# Altium PCB 电子脚铐本体主控板V3.PcbDoc
Units mm, origin at the board's own origin, x right, y up, seen from the top; angles counter-clockwise.
Board outline 20 x 50 mm, 2 copper layers (Top Layer, Bottom Layer), stack 1.071 mm thick; 72 components, 48 nets, 216 pads, 38 vias.
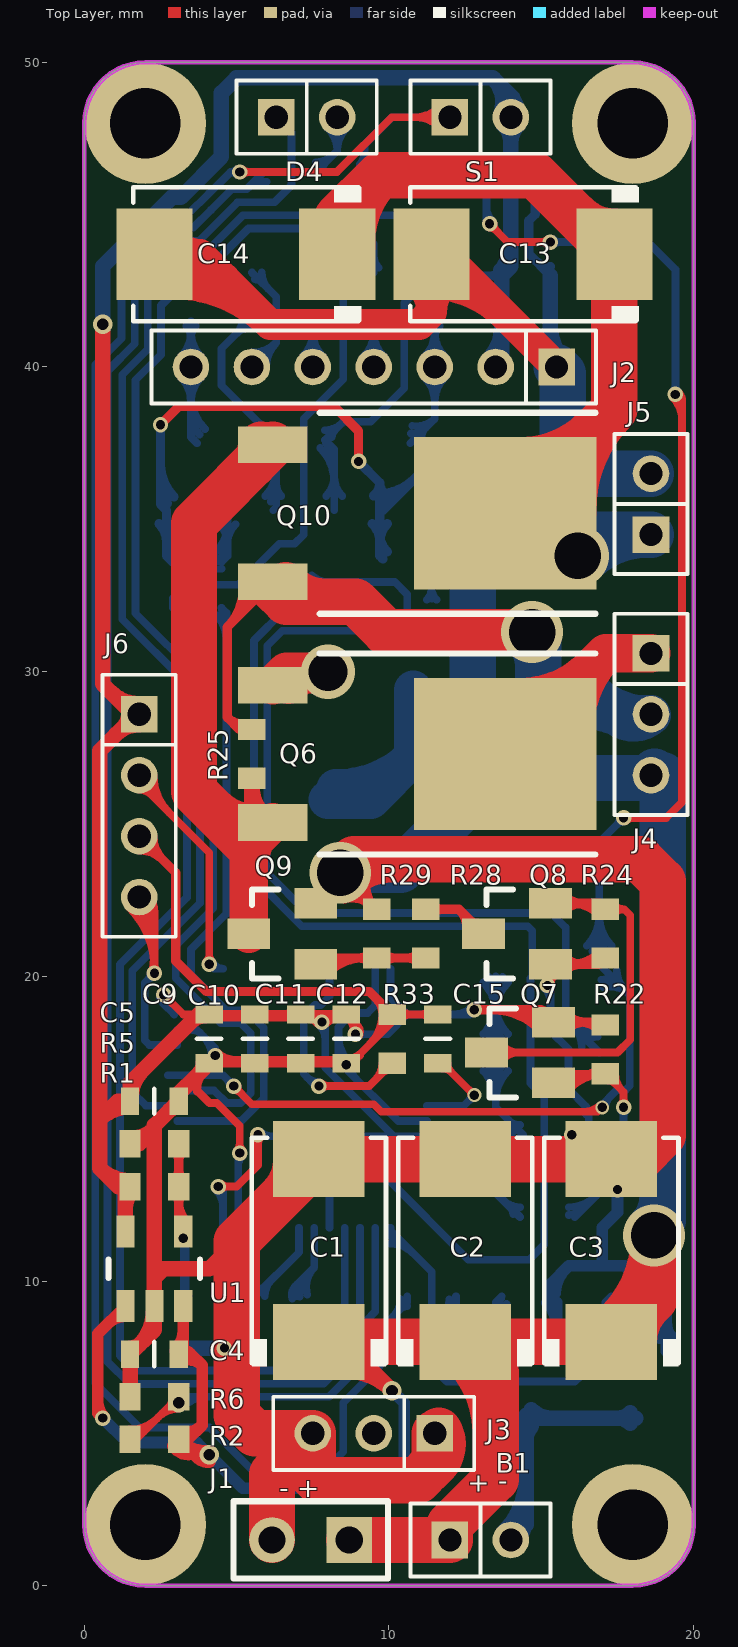
[diagram p0: Top Layer view]
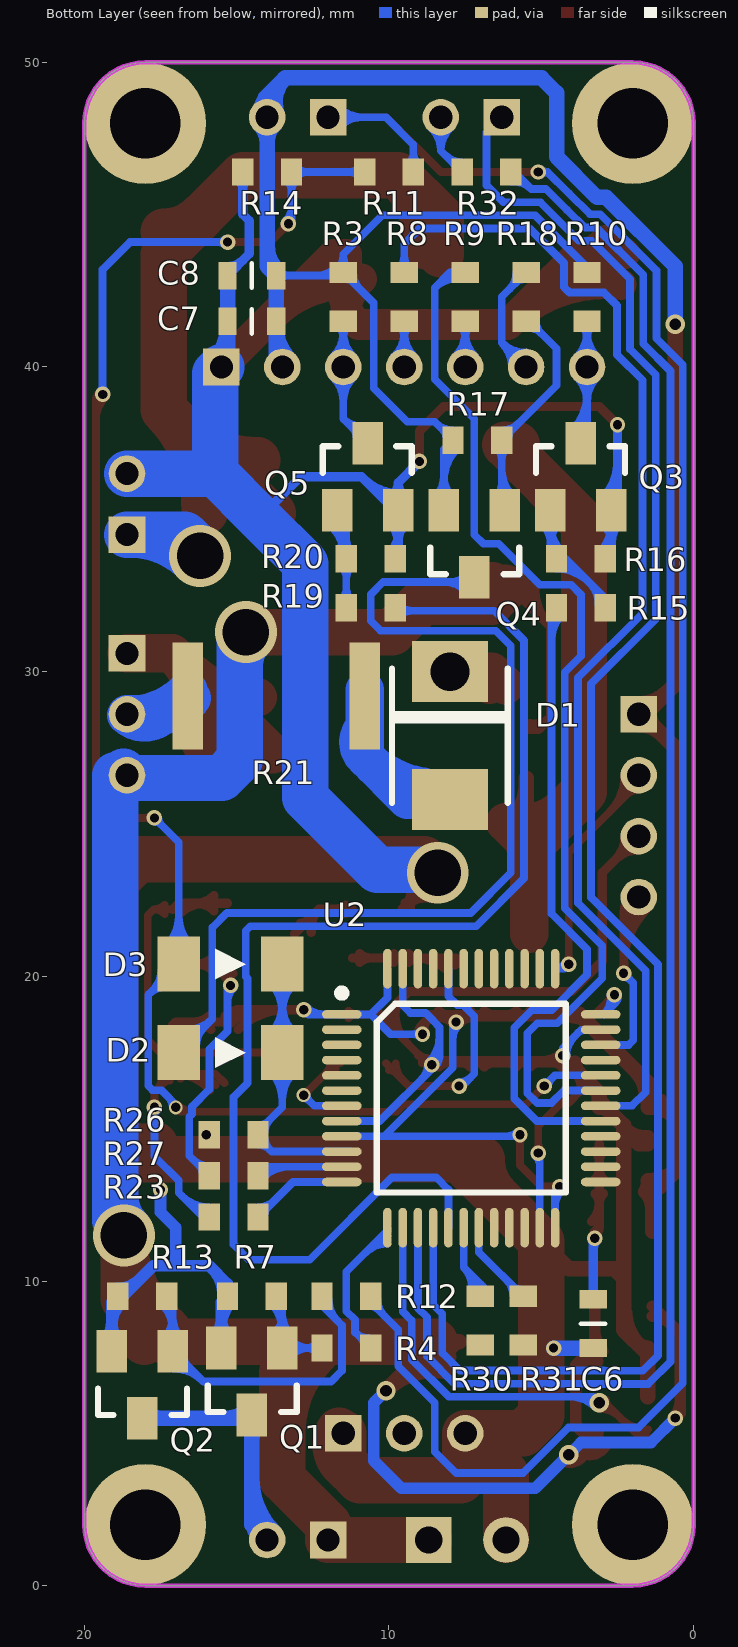
[diagram p1: Bottom Layer view, seen from below]
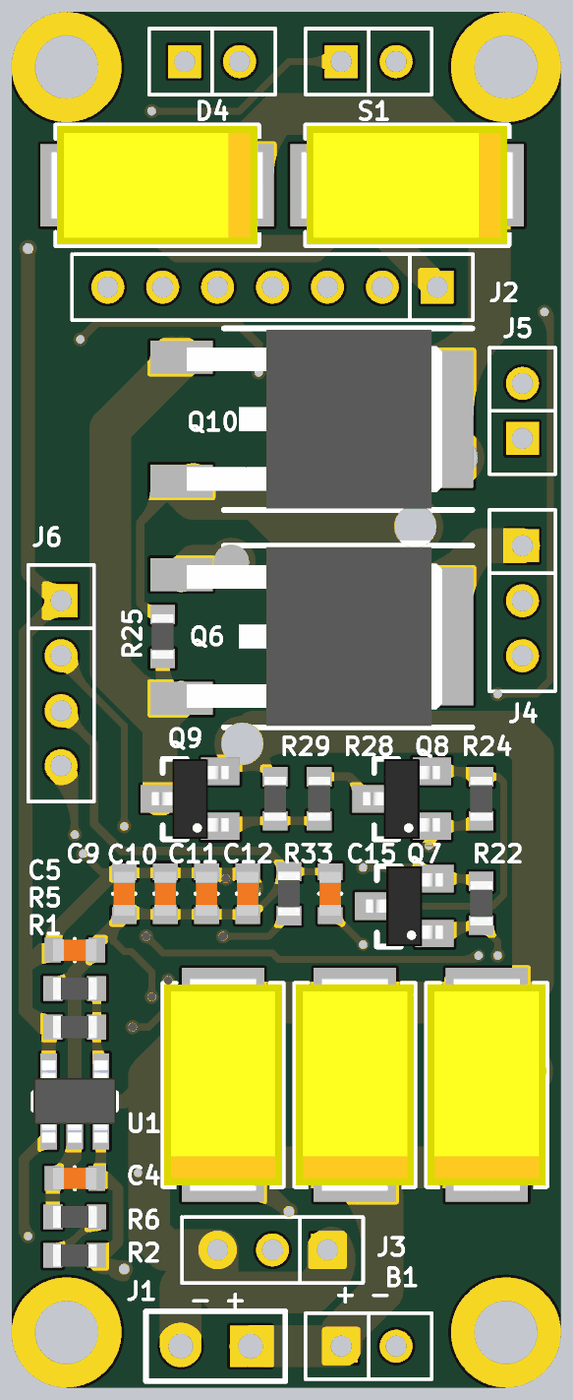
[diagram p2: 3D render of the assembled board from above, using the file's embedded part models]
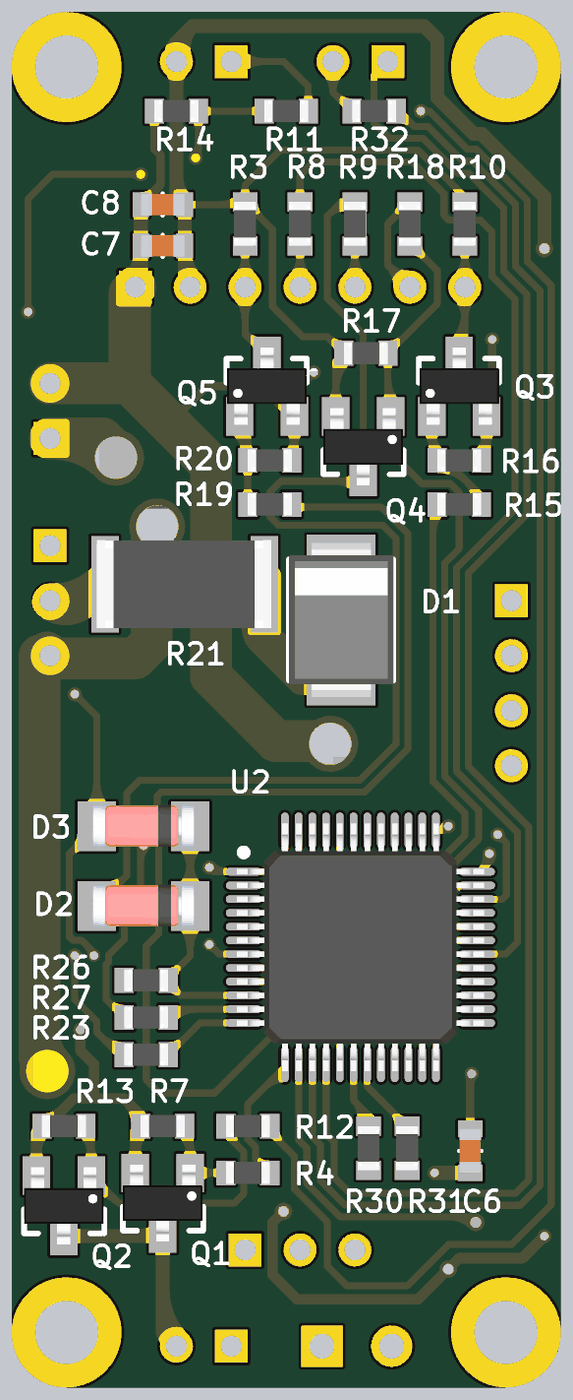
[diagram p3: 3D render of the assembled board from below, using the file's embedded part models]

## Layer stack, top to bottom
Top Solder: solder mask 0.0102, Solder Resist, Dk 3.5
Top Layer: signal copper 0.0356
Dielectric 1: dielectric 1, FR-4, Dk 4.8
Bottom Layer: signal copper 0.0356
Bottom Solder: solder mask 0.0102, Solder Resist, Dk 3.5

## Board outline
0,2 ccw(c2,2) 2,0 18,0 ccw(c18,2) 20,2 20,48 ccw(c18,48) 18,50 2,50 ccw(c2,48) 0,48

## Design rules (kind name [scope] priority, off if disabled: settings)
Clearance [All] p1: gap=0.152
ComponentClearance [All] p1: gap=0 collisioncheckmode=3 verticalgap=0 showdistances=FALSE
Height [All] p1: minheight=0 maxheight=50.8 prefheight=12.7
HoleSize [All] p1: absolutevalues=TRUE maxlimit=5.08 minlimit=0.025 maxpercent=80.000 minpercent=20.000
HoleToHoleClearance [All] p1: gap=0.152 allowstackedmicrovias=TRUE
MinimumSolderMaskSliver [All] p1: minsoldermaskwidth=0
PlaneConnect [All] p1: planeconnectstyle=Direct reliefexpansion=0.508 reliefentries=4 reliefconductorwidth=0.254 reliefairgap=0.254
PolygonConnect [All] p1: connectstyle=Direct reliefconductorwidth=0.254 reliefentries=4 polygonreliefangle="90 Angle" airgapwidth=0.254
RoutingVias [All] p1: holewidth=0.711 width=1.27 viastyle="Through Hole" minholewidth=0.203 minwidth=0.305 maxholewidth=5.08 maxwidth=7.62
SilkToSilkClearance [All] p1: silktosilkclearance=0
SilkToSolderMaskClearance [IsPad] p1: minsilkscreentomaskgap=0 clearancetoexposedcopper=TRUE
SolderMaskExpansion [All] p1: expansion=0.102
Width [All] p1: maxlimit=4 minlimit=0.254 preferedwidth=0.254
21 further rules are at their usual default settings.

## Components (designator, comment, footprint, x,y, rotation, side; value= is the part's Value field where it differs from the comment)
B1 "beep" Jk1*2-2.0 13,1.5 r0 top locked
C1 "210uF/16V" C7343 7.7,11 r90 top locked
C2 "210uF/16V" C7343 12.5,11 r90 top locked
C3 "210uF/16V" C7343 17.3,11 r90 top locked
C4 "0.1uF" C0603 2.3,7.6 r0 top locked
C5 "10uF" C0603 2.3,15.9 r0 top locked
C6 "470pF" C0603 3.3,8.6 r270 bottom locked
C7 "10uF" C0603 14.5,41.5 r0 bottom locked
C8 "0.1uF" C0603 14.5,43 r0 bottom locked
C9 "0.1uF" C0603 4.1,17.95 r270 top locked
C10 "0.1uF" C0603 5.6,17.95 r270 top locked
C11 "0.1uF" C0603 7.1,17.95 r270 top locked
C12 "0.1uF" C0603 8.6,17.95 r270 top locked
C13 "210uF/16V" C7343 14.4,43.7 r180 top locked
C14 "210uF/16V" C7343 5.3,43.7 r180 top locked
C15 "0.1uF" C0603 11.6,17.95 r90 top locked
D1 "SK58B" SMB 8,27.9 r90 bottom locked
D2 "1N4148" SOD-80-S 15.2,17.5 r180 bottom locked
D3 "1N4148" SOD-80-S 15.2,20.4 r180 bottom locked
D4 "LED" Jk1*2-2.0 7.3,48.2 r0 top locked
J1 "Jack 1x2" HDR1X2 8.7,1.5 r180 top locked
J2 "Jack 1x7" Jk1*7-2.0 9.5,40 r180 top locked
J3 "Jack 1x3" Jk1*3-2.0 9.5,5 r180 top locked
J4 "Jack 1x3" Jk1*3-2.0 18.6,28.6 r270 top locked
J5 "Jack 1x2" Jk1*2-2.0 18.6,35.5 r90 top locked
J6 "SHD1X4-2.00" Jk1*4-2.0 1.8,25.6 r270 top locked
Q1 "S8050" SOT-23 14.5,6.7 r0 bottom locked
Q2 "S8050" SOT-23 18.1,6.6 r0 bottom locked
Q3 "S8050" SOT-23 3.7,36.4 r180 bottom locked
Q4 "S8550" SOT-23 7.2,34.2 r0 bottom locked
Q5 "S8050" SOT-23 10.7,36.4 r180 bottom locked
Q6 "MJD3055" TO-252 10,27.3 r270 top locked
Q7 "S8550" SOT-23 14.3,17.5 r90 top locked
Q8 "S8550" SOT-23 14.2,21.4 r90 top locked
Q9 "ZXTN2031F" SOT-23 6.5,21.4 r90 top locked
Q10 "2SA1615" TO-252 10,35.2 r270 top locked
R1 "100K" R0603 2.3,13.1 r0 top locked
R2 "300K" R0603 2.3,4.8 r180 top locked
R3 "300K" R0603 11.5,42.3 r90 bottom locked
R4 "300K" R0603 11.4,7.8 r0 bottom locked
R5 "160K" R0603 2.3,14.5 r180 top locked
R6 "100K" R0603 2.3,6.2 r180 top locked
R7 "100K" R0603 14.5,9.5 r180 bottom locked
R8 "10R" R0603 9.5,42.3 r90 bottom locked
R9 "10R" R0603 7.5,42.3 r90 bottom locked
R10 "300K" R0603 3.5,42.3 r90 bottom locked
R11 "1K" R0603 10,46.4 r0 bottom locked
R12 "300K" R0603 11.4,9.5 r0 bottom locked
R13 "100K" R0603 18.1,9.5 r180 bottom locked
R14 "100K" R0603 14,46.4 r0 bottom locked
R15 "300k" R0603 3.7,32.1 r180 bottom locked
R16 "100K" R0603 3.7,33.7 r0 bottom locked
R17 "300K" R0603 7.1,37.6 r0 bottom locked
R18 "100k" R0603 5.5,42.3 r90 bottom locked
R19 "300k" R0603 10.6,32.1 r180 bottom locked
R20 "100K" R0603 10.6,33.7 r0 bottom locked
R21 "51R" R2512 13.7,29.2 r0 bottom locked
R22 "300K" R0603 17.1,17.6 r90 top locked
R23 "100K" R0603 15.1,12.1 r180 bottom locked
R24 "300K" R0603 17.1,21.4 r90 top locked
R25 "300K" R0603 5.5,27.3 r270 top locked
R26 "300K" R0603 15.1,14.8 r0 bottom locked
R27 "100K" R0603 15.1,13.45 r180 bottom locked
R28 "300K" R0603 11.2,21.4 r90 top locked
R29 "100K" R0603 9.6,21.4 r270 top locked
R30 "NC" R0603 7,8.7 r90 bottom locked
R31 "NC" R0603 5.6,8.7 r90 bottom locked
R32 "1K" R0603 6.8,46.4 r0 bottom locked
R33 "100K" R0603 10.1,17.95 r90 top locked
S1 "Switch" Jk1*2-2.0 13,48.2 r0 top locked
U1 "MIC5219YM5" SOT-23-5 2.3,10.4 r90 top locked
U2 "STM32F103CB" LQFP48 7.3,16 r180 bottom locked

## Footprints (in the part's own frame and the unit in brackets; to place one, negate y for a bottom-side part, rotate by r counter-clockwise, add the part's x,y. Pads: shape width x height; smd on the part's side, far side on the other; paste and mask are expansions set on the pad)
C0603 [mm]
  rect 0.6x0.9 smd: 1(-0.8,0) 2(0.8,0)
  silkscreen extent 0,-0.4 0,0.4, body extent -0.8,-0.4 0.8,0.4, height 0.5
C7343 [mm] "100uF/25V"
  rect 2.5x3 smd: 1(-3,0) 2(3,0)
  silkscreen extent -3.8,-2.2 3.7,2.2, body extent -3.87,-2.15 3.87,2.15, height 2.9
HDR1X2 [mm] "Connector; Header; 2 Position"
  rect 1.5x1.5 hole 0.9: 1(0,0)
  round 1.5 hole 0.9: 2(2.54,0)
  silkscreen extent -1.27,-1.27 3.81,1.27
Jk1*2-2.0 [mm]
  rect 1.2x1.2 hole 0.762: 1(-1,0)
  round 1.2 hole 0.762: 2(1,0)
  silkscreen extent -2.3,-1.2 2.3,1.2
Jk1*3-2.0 [mm]
  rect 1.2x1.2 hole 0.762: 1(-2,0)
  round 1.2 hole 0.762: 2(0,0) 3(2,0)
  silkscreen extent -3.3,-1.2 3.3,1.2
Jk1*4-2.0 [mm] "4P，直插，2.0mm间距，排母"
  rect 1.2x1.2 hole 0.762: 1(-3,0)
  round 1.2 hole 0.762: 2(-1,0) 3(1,0) 4(3,0)
  silkscreen extent -4.3,-1.2 4.3,1.2, body extent -4.25,-1.22 4.25,1.18, height 4.3
Jk1*7-2.0 [mm]
  rect 1.2x1.2 hole 0.762: 1(-6,0)
  round 1.2 hole 0.762: 2(-4,0) 3(-2,0) 4(0,0) 5(2,0) 6(4,0) 7(6,0)
  silkscreen extent -7.3,-1.2 7.3,1.2
LQFP48 [mm]
  oval 1.3x0.28 smd: 1(-4.25,2.75) 2(-4.25,2.25) 3(-4.25,1.75) 4(-4.25,1.25) 5(-4.25,0.75) 6(-4.25,0.25) 7(-4.25,-0.25) 8(-4.25,-0.75) 9(-4.25,-1.25) 10(-4.25,-1.75) 11(-4.25,-2.25) 12(-4.25,-2.75) 25(4.25,-2.75) 26(4.25,-2.25) 27(4.25,-1.75) 28(4.25,-1.25) 29(4.25,-0.75) 30(4.25,-0.25) 31(4.25,0.25) 32(4.25,0.75) 33(4.25,1.25) 34(4.25,1.75) 35(4.25,2.25) 36(4.25,2.75)
  oval 0.28x1.3 smd: 13(-2.75,-4.25) 14(-2.25,-4.25) 15(-1.75,-4.25) 16(-1.25,-4.25) 17(-0.75,-4.25) 18(-0.25,-4.25) 19(0.25,-4.25) 20(0.75,-4.25) 21(1.25,-4.25) 22(1.75,-4.25) 23(2.25,-4.25) 24(2.75,-4.25) 37(2.75,4.25) 38(2.25,4.25) 39(1.75,4.25) 40(1.25,4.25) 41(0.75,4.25) 42(0.25,4.25) 43(-0.25,4.25) 44(-0.75,4.25) 45(-1.25,4.25) 46(-1.75,4.25) 47(-2.25,4.25) 48(-2.75,4.25)
  silkscreen extent -4.38,-3.1 3.1,3.57, body extent -4.49,-4.5 4.51,4.5, height 1.8
R0603 [mm]
  rect 0.7x0.9 smd: 1(-0.8,0) 2(0.8,0)
  body extent -0.8,-0.4 0.8,0.4, height 0.37
R2512 [mm]
  rect 1x3.5 smd: 1(-2.9,0) 2(2.9,0)
  body extent -3.15,-1.6 3.2,1.6, height 0.47
SMB [mm]
  rect 2x2.5 smd: 1(-2.1,0) 2(2.1,0)
  silkscreen extent -2.2,-1.9 2.2,1.9, body extent -2.79,-1.91 2.81,1.9, height 2.4
SOD-80-S [mm]
  rect 1.4x1.8 smd: 1(-1.7,0) 2(1.7,0)
  silkscreen extent -0.5,-0.5 0.5,0.5, body extent -1.85,-0.79 1.85,0.81, height 1.6
SOT-23 [mm]
  rect 1x1.4 smd: 1(-1,-1.1) 2(1,-1.1) 3(0,1.1)
  silkscreen extent -1.47,0.13 1.45,1, body extent -1.45,-1.4 1.45,1.4, height 1.3
SOT-23-5 [mm]
  rect 1.05x0.6 smd: 1(-1.225,0.95) 2(-1.225,0) 3(-1.225,-0.95) 4(1.225,-0.95) 5(1.225,0.95)
  silkscreen extent -0.3,-1.5 0.3,1.5, body extent -1.5,-1.5 1.5,1.5, height 1.2
TO-252 [mm]
  rect 1.2x2.28 smd: 1(-2.25,-3.816) 3(2.25,-3.816)
  rect 5x6 smd: 2(0,3.816)
  silkscreen extent -3.3,-2.27 3.3,6.78, body extent -3.25,-3.62 3.25,5.68, height 2.3

## Part data
B1: library part Speaker, "Loudspeaker"
C1 C2 C3 C13 C14: library part "Cap Poll"
C4 C9 C10 C11 C12 C15: library part "Cap Semi"
C5 C6 C7 C8: library part CAP, "CAP"
D1 D2 D3: library part DIODE-SWITCHING, "Silicon Epitaxial Planar Diodes"
J1 J2 J3 J4 J5: "插座"
J6: library part HEADER1X4
Q1 Q2 Q3 Q5: "NPN triode, 0.5A Max"
Q4 Q7 Q8: "PNP triode"
Q6 Q10: library part MJD122
Q9: library part S8050, "NPN triode, 0.5A Max"
R1 R2 R5 R6 R30 R31 R32 R33: library part Res
R3 R4 R7 R8 R9 R10 R11 R12 R13 R14 R15 R16 R17 R18 R19 R20 R21 R22 R23 R24 R25 R26 R27 R28 R29: library part RES, "Resistor"
S1: library part Sw
U1: library part MIC5205
U2: library part STM32F103Cx

## Free pads (board coordinates)
  round 4 hole 2.3: ""(2,2) ""(2,48) ""(18,2) ""(18,48)

## Via types
v1: diameter 0.508, hole 0.305, Top Layer to Bottom Layer, tented both sides, 27 vias
v2: diameter 0.635, hole 0.381, Top Layer to Bottom Layer, tented both sides, 4 vias
v3: diameter 2.032, hole 1.524, Top Layer to Bottom Layer, tented both sides, 4 vias
v4: diameter 0.457, hole 0.305, Top Layer to Bottom Layer, tented both sides, 2 vias
v5: diameter 1.778, hole 1.27, Top Layer to Bottom Layer, tented both sides, 1 vias

## Nets (pads, with @x,y where several pads share a name; then routed paths per layer and width w, separated by ;. In a path a pad name is that pad's centre, name@x,y a point inside that pad or via, vN(x,y) a via of type N, cw(c..) or ccw(c..) an arc to the next point about the centre after c; other vN are vias at no path point)
+3.3V: C5.1 C7.1 C8.1 C9.1 C10.1 C11.1 C12.1 J2.2 J6.1 Q4.2 Q7.2 R1.1 R3.2 R10.2 R17.2 R22.2 S1.2 U1.5 U2.1 U2.9 U2.24 U2.36 U2.48 | length 158.7
  Top Layer w0.254: v1@2.6,19.273 cw(c2.6,18.966) 2.817,19.183 cw(c3.034,19.4) v1@2.727,19.4 ; v1(2.6,19.4) 3.25,18.75 3.75,18.75 C9.1 ; C9.1@3.828,18.628 ccw(c3.532,18.332) 3.532,18.75 ccw(c3.532,19.168) C9.1@3.828,18.872 ; v1(4.4,13.1) 5,13.1 5.7,13.8 v1(5.7,14.8) ; v1@4.49,13.01 cw(c4.707,12.793) 4.707,13.1 cw(c4.707,13.407) v1@4.49,13.19 ; v1@5.61,14.71 cw(c5.393,14.493) 5.7,14.493 cw(c6.007,14.493) v1@5.79,14.71 ; C12.1@8.643,18.614 cw(c8.223,18.083) v1@8.9,18.083 ; v1@8.785,18.155 ccw(c8.392,18.342) 8.7,18.65 8.9,18.45 v1(8.9,18.1) ; v1@8.79,18.163 ccw(c8.538,18.309) 8.819,18.385 ; v1@8.81,18.19 ccw(c8.593,18.407) 8.9,18.407 ccw(c9.207,18.407) v1@8.99,18.19 ; 8.814,18.405 ccw(c9.124,18.489) v1@8.964,18.21 ; 8.954,18.396 cw(c8.737,18.178) v1@9.015,18.045
  Top Layer w0.305: v1(12.8,18.9) 15,18.9 Q7.2 17,18.5 R22.2 ; 13.395,18.9 cw(c13.395,16.695) Q7.2@14.954,18.254 ; 14.131,18.9 cw(c14.131,17.431) Q7.2@15.17,18.47 ; Q7.2@14.867,18.9 cw(c14.867,18.167) Q7.2@15.385,18.685 ; Q7.2@15.846,18.254 cw(c16.439,17.661) 16.439,18.5 cw(c16.439,19.339) Q7.2@15.846,18.746 ; 16.282,18.5 cw(c16.282,17.682) R22.2@16.86,18.26
  Top Layer w0.381: C9.1@4.1,18.7 8.65,18.7 C12.1@8.7,18.65 ; C9.1@4.327,18.827 ccw(c4.635,19.135) 4.635,18.7 ; 5.065,18.7 ccw(c5.065,19.135) C10.1@5.373,18.827 ; C10.1@5.827,18.827 ccw(c6.135,19.135) 6.135,18.7 ; 6.565,18.7 ccw(c6.565,19.135) C11.1@6.873,18.827 ; C11.1@7.164,18.7 cw(c7.164,17.864) v1@7.755,18.455 ; C11.1@7.327,18.827 ccw(c7.635,19.135) 7.635,18.7 ; C11.1@7.34,18.779 cw(c7.167,18.135) v1@7.745,18.468 ; C11.1@7.383,18.767 cw(c7.237,18.223) v1@7.743,18.472 ; v1@7.845,18.455 cw(c8.436,17.864) C12.1@8.436,18.7 ; 8.065,18.7 ccw(c8.065,19.135) C12.1@8.373,18.827
  Top Layer w0.508: v2(0.6,41.4) 0.6,29.6 J6.1@1.6,28.6 ; 0.868,29.332 ccw(c1.8,30.264) J6.1@1.8,28.946 ; 1.039,27.939 cw(c1.8,27.177) J6.1@1.8,28.254 ; J6.1@1.28,28.18 ccw(c0.86,28.6) J6.1@1.454,28.6 ; U1.5 1.35,12.95 R1.1 1.108,13.1 0.508,13.7 ; 1.35,12.406 cw(c2.094,12.406) R1.1@1.568,12.932 ; R1.1@1.499,13.296 cw(c1.484,14.675) 0.508,13.7 ; C5.1@1.499,15.704 ccw(c1.465,14.351) 0.508,15.308 ; C5.1@1.546,16.05 cw(c2.743,16.05) 1.897,16.897 ; J6.1@1.7,28.6 0.508,27.408 0.508,15.308 ; 3.53,18.53 cw(c3.95,18.11) C9.1@3.95,18.704 ; C9.1@3.75,18.75 1.5,16.5 C5.1 1.1,15.9 0.508,15.308 ; 0.508,13.7 0.508,15.308
  Bottom Layer w0.254: v1@2.474,19.414 ccw(c2.826,19.375) 2.576,19.124 ; v1@2.512,19.309 cw(c2.309,19.1) 2.6,19.1 ; v1(2.6,19.4) 2.6,19.1 ; v1@2.688,19.309 ccw(c2.891,19.1) 2.6,19.1 ; v1@2.726,19.386 ccw(c3.501,19.301) 2.95,18.75 2.6,19.1 ; R10.2 3.5,43.268 5.21,44.978 10.222,44.978 11.5,43.7 R3.2 10.5,42.1 10.5,39.3 9.4,38.2 8.5,38.2 R17.2 8.2,37.3 Q4.2 ; v1@4.31,13.01 cw(c3.731,12.431) 4.55,12.431 ; v1(4.4,13.1) 4.55,12.95 U2.24 ; v1(5.7,14.8) 5.75,14.75 10.16,14.75 ; v1@5.79,14.89 ccw(c6.127,15.227) 6.127,14.75 ; v1@7.71,18.41 cw(c7.229,17.929) 7.909,17.929 ; R17.2@7.742,37.342 cw(c6.637,36.237) 8.2,36.237 ; v1(7.8,18.5) 7.909,18.391 7.909,17 10.16,14.75 ; R17.2@7.9,37.923 ccw(c7.9,38.703) 8.451,38.151 ; R17.2@7.922,37.522 cw(c7.251,36.851) 8.2,36.851 ; Q4.2@7.936,35.764 ccw(c7.3,36.4) 8.2,36.4 ccw(c9.1,36.4) Q4.2@8.464,35.764 ; R17.2@8.123,37.7 cw(c8.42,37.7) R17.2@8.21,37.91 ; v1(8.9,18.1) 9.95,18.1 10.6,18.75 ; v1@8.99,18.01 cw(c9.207,17.793) 9.207,18.1 cw(c9.207,18.407) v1@8.99,18.19 ; U2.48 10.05,19.3 10.6,18.75 ; 10.949,42.549 ccw(c10.397,43.1) R3.2@11.177,43.1 ; R3.2@11.19,42.79 cw(c11.4,42.58) R3.2@11.4,42.877 ; R3.2@11.342,43.258 ccw(c10.962,43.638) 11.5,43.638 ccw(c12.038,43.638) R3.2@11.658,43.258 ; U2.9 10.16,14.75 ; R3.2@11.6,43.1 11.7,43 C8.1 ; R3.2@11.758,43.258 ccw(c12.38,43.88) 12.38,43 ; U2.1@12.131,18.75 ccw(c12.131,19.569) v1@12.71,18.99 ; v1(12.8,18.9) 12.65,18.75 U2.1 10.6,18.75 ; C8.1@13.578,42.878 ccw(c13.282,42.582) 13.282,43 ccw(c13.282,43.418) C8.1@13.578,43.122
  Bottom Layer w0.508: v2(0.6,41.4) 0.6,43.3 2.868,45.568 3.168,45.568 4.5,46.9 4.5,49 4.992,49.492 13.408,49.492 ; J2.2@13.255,40.245 ccw(c12.182,41.318) C7.1@13.7,41.318 ; J2.2 13.7,40.2 C7.1 C8.1 14,43.3 S1.2 14,48.9 ; C8.1@13.667,43.183 ccw(c12.865,43.985) 14,43.985 ; S1.2@13.674,48.316 ccw(c12.609,48.693) 13.408,49.492 ; S1.2@13.755,47.955 cw(c13.165,47.365) 14,47.365 cw(c14.835,47.365) S1.2@14.245,47.955 ; S1.2@13.79,48.475 ccw(c13.465,48.9) 14,48.9 ; 13.977,48.923 cw(c13.449,48.395) S1.2@14.153,48.146 ; S1.2@14.21,48.475 cw(c14.535,48.9) 14,48.9 ; 13.408,49.492 14,48.9
ADPOW: R2.2 R6.1 U2.14 | length 17.8
  Top Layer w0.254: R2.2 1.7,4.8 R6.1 ; R2.2@1.5,4.869 ccw(c1.5,5.518) 1.959,5.059 ; R2.2@1.5,5.123 ccw(c1.5,6.386) 2.393,5.493 ; 2.433,5.533 cw(c3.1,4.867) R6.1@3.1,5.81 ; 2.549,5.649 cw(c3.1,5.097) R6.1@3.1,5.877 ; R6.1@2.79,5.89 ccw(c2.58,6.1) R6.1@2.877,6.1
  Bottom Layer w0.254: v2@3.055,6.045 cw(c3.43,5.67) 3.43,6.2 ; v2(3.1,6) 3.3,6.2 8.031,6.2 9.25,7.419 9.25,8.7 9.55,9 U2.14 ; v2@3.235,5.865 cw(c4.043,5.057) 4.043,6.2
BAT: B1.1 C1.1 C2.1 C3.1 C4.2 J1.1 J4.3 Q10.3 R2.1 R25.1 U1.1 U1.3 | length 119.2
  Top Layer w0.305: 5.141,31.907 ccw(c4.252,32.797) Q10.3@5.502,32.934 ; Q10.3@5.199,32.901 cw(c3.443,32.708) 4.692,31.458 ; R25.1@5.363,28.294 cw(c5.222,29.029) 4.692,28.5 ; R25.1 5.092,28.1 4.692,28.5 ; Q10.3 4.692,31.458 ; 4.692,28.5 4.692,31.458
  Top Layer w0.381: 0.445,6.029 ccw(c1.129,6.029) v1@0.645,5.545 ; v1(0.6,5.5) 0.445,5.655 0.445,8.27 U1.1 ; 0.779,8.604 cw(c1.35,8.033) U1.1@1.35,8.841 ; R2.1@2.911,4.584 ccw(c3.419,4.896) 3.419,4.3 ; C4.2@2.981,7.694 cw(c3.176,7.293) 3.492,7.608 ; C4.2@3.023,7.827 ccw(c2.474,8.376) 3.25,8.376 ; R2.1@3.1,4.541 cw(c3.1,3.914) 3.543,4.357 ; R2.1 ccw(c4.008,5.708) v2@4.092,4.427 ; R2.1@3.135,5.056 ccw(c3.307,5.832) 3.87,5.27 ; C4.2@3.148,7.352 cw(c3.424,6.784) 3.87,7.23 ; R2.1@3.236,4.783 ccw(c4.1,5.314) v2(4.1,4.3) 3.6,4.3 R2.1 3.4,4.8 3.87,5.27 ; U1.3 3.25,7.75 C4.2 3.5,7.6 3.87,7.23 ; 3.695,4.205 ccw(c4.081,4.592) v2@4.117,4.047 ; C1.1 C1.1@8.437,7.263 ; 3.87,5.27 3.87,7.23
  Top Layer w0.508: C1.1 8.5,8 v2(10.1,6.4) ccw(c8.52,4.82) C1.1@8.126,7.02 ; C1.1@8.036,7.52 cw(c8.311,5.986) 9.412,7.088 ; C1.1@8.946,8 ccw(c10.023,8) 9.261,7.239
  Top Layer w1.524: Q10.3@6.184,32.75 6.634,32.3 8.9,32.3 9.9,31.3 v3(14.7,31.3) ; Q10.3@6.609,32.835 ccw(c7.902,34.128) 7.902,32.3 ; C1.1@8.5,8 C2.1 ; J1.1 B1.1 12,2 13.5,3.5 13.5,7 C2.1 ; C2.1@12.405,7.655 cw(c9.761,5.011) 13.5,5.011 ; C3.1@17.237,8.375 ccw(c14.63,11.5) v3(18.7,11.5) 18.7,9.4 C3.1 C2.1 ; C3.1@18.038,8 cw(c19.82,8) 18.56,9.26
  Bottom Layer w0.381: v1(0.6,5.5) 1.4,4.7 3.7,4.7 v2(4.1,4.3) 5.2,3.2 9.6,3.2 10.5,4.1 10.5,6 v2(10.1,6.4)
  Bottom Layer w1.524: v3@14.52,31.12 cw(c13.604,30.204) 14.9,30.204 ; v3(14.7,31.3) 14.9,31.1 14.9,27.1 15.49,26.51 18.51,26.51 J4.3 18.984,26.6 18.984,11.984 18.8,11.8 18.8,11.6 v3(18.7,11.5) ; v3@18.52,11.68 ccw(c17.401,12.799) 18.984,12.799 ; J4.3@18.715,26.715 cw(c18.064,26.064) 18.984,26.064
BOOT0: R33.1 U2.44 | length 9
  Top Layer w0.254: v1(7.7,16.4) 9.35,16.4 R33.1 ; v1@7.79,16.31 cw(c8.007,16.093) 8.007,16.4 cw(c8.007,16.707) v1@7.79,16.49 ; 9.549,16.599 ccw(c8.997,17.15) R33.1@9.777,17.15 ; R33.1@9.79,16.84 cw(c10,16.63) R33.1@10,16.927
  Bottom Layer w0.254: 7.312,16.688 ccw(c7.7,17.075) v1@7.7,16.527 ; v1(7.7,16.4) 7.6,16.4 7.2,16.8 7.2,18.69 7.569,19.059 7.759,19.059 8.05,19.35 U2.44
CTRBEEP: R4.1 U2.13 | length 6.7
  Bottom Layer w0.254: U2.13@10.05,11.227 cw(c10.05,10.206) 10.772,10.928 ; U2.13@10.05,11.481 cw(c10.05,11.073) 10.338,11.362 ; U2.13 10.05,11.65 11.4,10.3 11.4,9.011 11.113,8.724 11.113,8.313 ; R4.1 11.113,8.313 ; R4.1@10.613,8.123 ccw(c10.65,8.776) 11.113,8.313 ; R4.1@10.823,7.9 cw(c11.12,7.9) R4.1@10.91,8.11
CTRSHOCK: R27.2 U2.11 | length 4.3
  Bottom Layer w0.254: U2.11 14,13.75 R27.2 ; 13.279,13.75 cw(c13.279,12.529) R27.2@14.142,13.392 ; 13.892,13.75 cw(c13.892,13.142) R27.2@14.322,13.572
CTRSHOCKPOW: R23.2 U2.12 | length 4.4
  Bottom Layer w0.254: U2.12@11.25,13.25 U2.12 13.15,13.25 R23.2 ; 13.749,12.651 ccw(c14.3,13.203) R23.2@14.3,12.423 ; R23.2@13.99,12.41 cw(c13.78,12.2) R23.2@14.077,12.2
DECCUT: D3.1 R11.2 R14.1 U2.32 | length 71.4
  Top Layer w0.254: v1@4.9,16.273 cw(c4.9,15.966) 5.117,16.183 cw(c5.334,16.4) v1@5.027,16.4 ; v1(4.9,16.4) 5.5,15.8 9.5,15.8 9.745,15.555 16.855,15.555 v4(17,15.7) ; v1@13.3,44.573 cw(c13.3,44.266) 13.517,44.483 cw(c13.734,44.7) v1@13.427,44.7 ; v1(13.3,44.7) 13.9,44.1 v1(15.3,44.1) ; v1@15.21,44.01 ccw(c14.993,43.793) 14.993,44.1 ccw(c14.993,44.407) v1@15.21,44.19 ; 16.404,15.555 ccw(c16.404,16.296) v4@16.928,15.772 ; v1(17.7,25.2) 19.1,25.2 19.619,25.719 19.619,38.881 v1(19.4,39.1) ; v1@17.79,25.11 cw(c18.007,24.893) 18.007,25.2 cw(c18.007,25.507) v1@17.79,25.29 ; v1@19.31,39.01 cw(c18.565,38.265) 19.619,38.265 ; v1@19.4,38.973 cw(c19.4,38.666) 19.617,38.883 cw(c19.834,39.1) v1@19.527,39.1 ; v1@19.49,39.19 cw(c19.178,38.878) 19.619,38.878
  Bottom Layer w0.254: U2.32@2.75,16.75 U2.32 4.55,16.75 v1(4.9,16.4) ; v1@4.773,16.4 ccw(c4.466,16.4) 4.683,16.617 ccw(c4.9,16.834) v1@4.9,16.527 ; R11.2 R14.1 13.2,44.8 v1(13.3,44.7) ; R11.2@10.958,46.242 cw(c11.338,45.862) 11.338,46.4 cw(c11.338,46.938) R11.2@10.958,46.558 ; R14.1@13.042,46.142 cw(c12.662,45.762) 13.2,45.762 cw(c13.738,45.762) R14.1@13.358,46.142 ; R14.1@13.042,46.242 ccw(c12.662,45.862) 12.662,46.4 ccw(c12.662,46.938) R14.1@13.042,46.558 ; 13.2,45.248 ccw(c13.848,45.248) v1@13.39,44.79 ; v1(15.3,44.1) 18.5,44.1 19.4,43.2 v1(19.4,39.1) ; v1@15.39,44.01 cw(c15.607,43.793) 15.607,44.1 cw(c15.607,44.407) v1@15.39,44.19 ; D3.1@16.495,21.005 ccw(c15.517,21.983) 16.9,21.983 ccw(c18.283,21.983) D3.1@17.305,21.005 ; D3.1@16.674,20.826 ccw(c16.13,21.37) 16.9,21.37 ccw(c17.67,21.37) D3.1@17.126,20.826 ; D3.1@16.974,19.89 cw(c17.124,19.258) D3.1@17.583,19.717 ; v4(17,15.7) 17,15.79 17.469,16.259 17.759,16.259 17.905,16.405 17.905,19.395 ; D3.1@17.032,19.642 cw(c17.247,18.738) 17.905,19.395 ; v4@17.102,15.7 cw(c17.565,15.7) 17.237,16.028 ; D3.1@17.473,20.2 ccw(c18.373,20.2) 17.737,19.563 ; v1@17.573,25.2 cw(c17.266,25.2) 17.483,24.983 cw(c17.7,24.766) v1@17.7,25.073 ; v1(17.7,25.2) 16.9,24.4 D3.1 17.905,19.395 ; v1@19.31,39.19 ccw(c19.093,39.407) 19.4,39.407 ccw(c19.707,39.407) v1@19.49,39.19
GND: C1.2 C2.2 C3.2 C4.1 C5.2 C6.2 C7.2 C8.2 C9.2 C10.2 C11.2 C12.2 C13.2 C14.2 C15.2 J1.2 J2.1 J3.1 J3.3 J5.2 J6.3 Q1.2 Q2.2 Q3.2 Q5.2 Q9.2 R5.2 R6.2 R7.1 R13.1 R14.2 R16.1 R20.1 R26.2 R29.1 R33.2 U1.2 U2.8 U2.23 U2.35 U2.47 | length 253.7
  Top Layer w0.254: 3.7,16.217 cw(c4.768,16.217) C9.2@4.064,17.02 ; 3.7,16.678 cw(c4.001,16.678) C9.2@3.969,16.978 ; 3.7,16.75 3.7,16.251 4.11,15.841 4.348,15.841 5.1,15.089 v1(5.1,14.2) ; 3.7,16.777 cw(c4.277,16.777) C9.2@3.897,17.211 ; v1@5.01,14.29 ccw(c4.793,14.507) 5.1,14.507 ccw(c5.407,14.507) v1@5.19,14.29 ; v3(8.4,23.4) R29.1 ; v3@8.514,22.775 cw(c8.664,21.949) 9.257,22.543 cw(c9.851,23.136) v3@9.025,23.286 ; v3@8.559,22.525 cw(c8.769,21.369) R29.1 ; v3@8.581,22.791 cw(c8.724,22.311) 9.158,22.562 ; C12.2@8.6,17.227 ccw(c8.6,17.752) C12.2@8.971,17.381 ; C12.2@8.724,17.071 cw(c9.162,16.967) C12.2@9.045,17.402 ; C12.2@8.74,17.15 10.1,18.51 R33.2 C15.2 ; C12.2@8.75,17.323 ccw(c8.75,17.717) C12.2@9.029,17.438 ; C12.2@8.923,17.15 cw(c9.364,17.15) 9.052,17.462 ; v3@9.049,22.751 cw(c8.497,22.2) R29.1@9.277,22.2 ; v3@9.275,23.241 ccw(c10.431,23.031) R29.1 ; R29.1@9.29,22.51 ccw(c9.5,22.72) R29.1@9.5,22.423 ; 9.379,17.788 ccw(c8.417,18.75) R33.2@9.777,18.75 ; 9.812,18.222 ccw(c9.284,18.75) R33.2@10.031,18.75 ; R33.2@10.358,18.592 cw(c10.738,18.212) 10.738,18.75 cw(c10.738,19.288) R33.2@10.358,18.908 ; C15.2@11.328,18.628 ccw(c11.032,18.332) 11.032,18.75 ccw(c11.032,19.168) C15.2@11.328,18.872
  Top Layer w0.305: J6.3@1.8,24.152 cw(c1.8,23.072) 2.564,23.836 cw(c3.328,24.6) J6.3@2.248,24.6 ; J6.3 3,23.4 3,20.5 4,19.5 9.35,19.5 R33.2 ; v1(2.5,38.1) 3.1,38.7 8.2,38.7 9,37.9 v1(9,36.9) ; 9.592,19.258 cw(c9.084,18.75) R33.2@9.802,18.75
  Top Layer w0.381: C9.2@4.2,17.2 8.5,17.2 v1(8.6,17.1) ; C9.2@4.327,17.073 cw(c4.635,16.765) 4.635,17.2 ; C9.2@4.345,17.445 ccw(c4.936,18.036) 4.936,17.2 ; 5.065,17.2 cw(c5.065,16.765) C10.2@5.373,17.073 ; C10.2@5.827,17.073 cw(c6.135,16.765) 6.135,17.2 ; 6.565,17.2 cw(c6.565,16.765) C11.2@6.873,17.073 ; C11.2@7.327,17.073 cw(c7.635,16.765) 7.635,17.2 ; 8.065,17.2 cw(c8.065,16.765) C12.2@8.373,17.073 ; C12.2@8.205,17.2 cw(c8.205,16.705) C12.2@8.555,17.055 ; C12.2@8.246,17.145 ccw(c8.399,17.411) C12.2@8.566,17.153
  Top Layer w0.508: R6.2 C4.1 2.3,8.4 U1.2 2.3,10.1 ; C4.1@1.5,7.796 ccw(c1.5,8.269) 1.835,7.935 ; R5.2 1.8,14.5 2.3,15 ; R5.2@1.505,14.696 ccw(c1.562,15.738) 2.3,15 ; 1.833,7.933 ccw(c0.815,8.95) U1.2@2.254,8.95 ; 2.747,15.558 cw(c3.1,15.205) C5.2@3.1,15.704 ; C5.2@2.989,15.8 2.3,15.111 2.3,15 ; C5.2 3.1,16.15 3.7,16.75 C9.2 ; 5,11.3 4.1,10.4 2.6,10.4 2.3,10.1 ; 2.3,10.1 2.3,15 ; 3.765,16.815 ccw(c3.431,17.15) C9.2@3.904,17.15 ; 3.765,16.815 ccw(c3.431,17.15) C9.2@3.904,17.15 ; 3.765,16.815 ccw(c3.431,17.15) C9.2@3.904,17.15
  Top Layer w1.016: C14.2@2.271,43.722 cw(c2.577,40.88) 4.599,42.901 ; C14.2 3.8,43.7 ; C14.2@2.379,42.712 cw(c2.869,38.169) 6.1,41.4 ; C14.2@2.89,43.25 cw(c3.8,42.555) 3.8,43.7 ; C14.2@2.89,44.15 ccw(c3.8,44.845) 3.8,43.7 ; C13.2@10.908,42.895 cw(c9.937,41.8) 11.4,41.8 ; C13.2@11.4,42.708 cw(c11.4,39.347) 13.776,41.724 ; C13.2@11.892,42.895 ccw(c12.863,41.8) 11.4,41.8 ; J2.1 11.8,43.7 C13.2 11.4,41.8 ; 3.8,43.7 6.1,41.4 11,41.4 11.4,41.8
  Top Layer w1.524: J1.2 6.16,3.66 J3.3 ; 6.44,12.74 ccw(c5.18,14) C1.2@6.962,14 ; v3(8.4,23.4) 8.84,23.84 18.26,23.84 18.984,23.116 18.984,14.784 ; v3@8.58,23.22 cw(c10.075,21.725) 10.075,23.84 ; 11.069,3.569 ccw(c9.639,5) J3.1@11.662,5 ; J3.1 11.5,4 ; J3.1@11.64,5.082 cw(c10.868,4.632) 11.5,4 ; C3.2@17.695,14.466 ccw(c18.076,15.692) 18.984,14.784 ; J3.3 7.5,3.6 7.64,3.46 10.96,3.46 11.5,4 ; J3.3 5.6,5 5,5.6 5,11.3 C1.2 C2.2 C3.2 18.2,14 18.984,14.784
  Bottom Layer w0.254: U2.35 3.689,18.25 4.3,17.639 v1(4.3,17.4) ; U2.35@3.56,18.237 cw(c3.56,17.894) 3.802,18.137 ; 3.914,18.025 cw(c3.289,17.4) v1@4.173,17.4 ; U2.23 5.05,14.15 v1(5.1,14.2) ; 5.05,13.773 cw(c5.527,13.773) v1@5.19,14.11 ; 8.341,17.418 ccw(c8.918,17.418) v1@8.51,17.01 ; 8.341,18.031 ccw(c9.531,18.031) v1@8.69,17.19 ; v1@8.473,17.1 ccw(c8.166,17.1) 8.383,17.317 ccw(c8.6,17.534) v1@8.6,17.227 ; v1@8.727,17.1 ccw(c9.396,17.1) 8.923,16.627 ; U2.47 9.55,19.05 9.3,18.8 8.8,18.8 8.55,18.55 8.55,18.54 8.341,18.331 8.341,17.359 v1(8.6,17.1) 8.6,16.95 10.3,15.25 U2.8@11.25,15.25
  Bottom Layer w0.305: Q3.2@2.454,34.854 cw(c1.861,34.261) 2.7,34.261 cw(c3.539,34.261) Q3.2@2.946,34.854 ; 2.5,36.086 ccw(c3.286,36.086) Q3.2@2.73,35.53 ; 2.5,36.822 ccw(c4.022,36.822) Q3.2@2.946,35.746 ; v1(2.5,38.1) 2.5,35.5 Q3.2 2.7,33.8 R16.1@2.9,33.6 ; Q3.2@2.7,34.76 ccw(c3.86,34.76) R16.1@3.04,33.94 ; v1(9,36.9) 9.7,36.2 ; Q5.2@9.454,34.854 cw(c8.861,34.261) 9.7,34.261 cw(c10.539,34.261) Q5.2@9.946,34.854 ; Q5.2@9.49,35.777 ccw(c9.169,36.2) 9.7,36.2 ; 9.7,34.518 ccw(c10.518,34.518) R20.1@9.94,33.94 ; Q5.2@9.7,35.543 ccw(c9.7,36.37) 10.285,35.785 ; Q5.2@9.7,35.848 ccw(c9.7,37.411) 10.806,36.306 ; R20.1 9.7,33.8 Q5.2 ; Q5.2@9.91,35.777 cw(c10.231,36.2) 9.7,36.2 ; 14.25,35.05 12.9,36.4 10.9,36.4 9.8,35.3 Q5.2 ; R14.2@14.66,46.16 cw(c14.323,45.823) 14.8,45.823 cw(c15.277,45.823) R14.2@14.94,46.16 ; 14.792,43.508 ccw(c15.3,44.016) C8.2@15.3,43.298 ; R14.2 14.8,45.016 14.584,44.8 14.584,43.716 C8.2 ; Q5.2 9.7,36.2
  Bottom Layer w0.381: R7.1@15.187,9.287 cw(c14.432,8.532) 15.5,8.532 ; Q1.2@15.281,8.219 ccw(c14.753,8.747) 15.5,8.747 ccw(c16.247,8.747) Q1.2@15.719,8.219 ; R7.1@15.459,9.6 cw(c16.569,9.6) 15.784,10.384 ; Q1.2 15.5,9.3 R7.1 15.3,9.9 15.9,10.5 17,10.5 ; v1(17.5,13) 17.5,12.258 17,11.758 17,10.5 ; 18.188,10.054 ccw(c18.9,10.767) R13.1@18.9,9.759 ; R13.1@18.787,9.287 cw(c18.032,8.532) 19.1,8.532 ; Q2.2@18.881,8.119 ccw(c18.353,8.647) 19.1,8.647 ccw(c19.847,8.647) Q2.2@19.319,8.119 ; Q2.2 19.1,9.3 R13.1 18.742,9.5 17.742,10.5 17,10.5
  Bottom Layer w0.508: C6.2 v1(4.6,7.8) ; C7.2@15.3,41.318 ccw(c16.818,41.318) J2.1@15.745,40.245 ; C8.2 C7.2 15.3,40.2 J2.1
  Bottom Layer w1.524: v3(8.4,23.4) 8.5,23.5 10.388,23.5 12.744,25.856 12.744,33.544 14.25,35.05 15.7,36.5 ; J2.1 15.7,39.8 15.7,36.5 ; J5.2 15.7,36.5
  other v1: 16,14.8
LEDBLUE: R32.1 U2.15 | length 55.5
  Bottom Layer w0.254: 4.15,45.15 3.579,44.578 3.207,44.578 1.654,43.025 1.654,40.762 0.762,39.87 0.762,7.351 1.491,6.622 3.112,6.622 3.121,6.632 7.852,6.632 8.75,7.53 8.75,8.811 9.05,9.111 U2.15 ; 4.155,45.145 4.855,45.845 4.865,45.845 4.869,45.841 5.331,45.841 ; R32.1@5.981,46.078 ccw(c5.91,45.263) 5.331,45.841 ; R32.1 5.89,46.4 5.331,45.841
LEDRED: D4.1 U2.16 | length 57.7
  Bottom Layer w0.254: D4.1 6.8,47.7 6.8,45.969 6.24,45.409 5.031,45.409 3.767,44.146 3.35,44.146 2.086,42.882 2.086,40.584 1.245,39.742 1.245,31.724 3.368,29.6 3.368,22.59 1.168,20.39 1.168,7.555 1.669,7.054 2.933,7.054 2.942,7.064 7.673,7.064 8.25,7.64 8.25,8.921 8.55,9.221 U2.16
NetB1_2: B1.2 Q1.3 Q2.3 | length 13.6
  Bottom Layer w0.508: B1.2@13.755,1.745 ccw(c11.958,3.542) 14.5,3.542 ; B1.2 14.5,2 Q1.3 14.6,5.5 Q2.3 ; B1.2@14.115,1.385 ccw(c13.184,2.316) 14.5,2.316 ; Q1.3@14.326,5.226 cw(c13.906,4.806) 14.5,4.806 cw(c15.094,4.806) Q1.3@14.674,5.226 ; Q1.3@14.674,5.774 ccw(c15.335,6.435) 15.335,5.5 ; Q2.3@17.926,5.326 ccw(c17.506,4.906) 17.506,5.5 ccw(c17.506,6.094) Q2.3@17.926,5.674
NetC6_1: C6.1 R1.2 R5.1 U1.4 | length 10.3
  Top Layer w0.305: R1.2@2.96,12.86 cw(c2.623,12.523) 3.1,12.523 cw(c3.577,12.523) R1.2@3.24,12.86 ; R1.2@2.96,13.34 ccw(c2.623,13.677) 3.1,13.677 ccw(c3.577,13.677) R1.2@3.24,13.34 ; R5.1@2.96,14.26 cw(c2.623,13.923) 3.1,13.923 cw(c3.577,13.923) R5.1@3.24,14.26 ; U1.4@3.1,12.007 ccw(c3.857,12.007) U1.4@3.322,11.472 ; 3.1,12.568 ccw(c3.968,12.568) U1.4@3.354,11.954 ; R5.1 R1.2 U1.4@3.1,11.775 ; U1.4@3.158,11.443 ccw(c2.893,11.568) U1.4@3.1,11.775 ; v1(3.25,11.4) U1.4 U1.4@3.1,11.775 ; U1.4@3.289,11.494 cw(c3.404,11.775) U1.4@3.1,11.775
  Bottom Layer w0.305: v1@3.178,11.328 cw(c2.884,11.034) 3.3,11.034 ; C6.1@3.196,9.504 ccw(c2.944,9.756) 3.3,9.756 ccw(c3.656,9.756) C6.1@3.404,9.504 ; v1(3.25,11.4) 3.3,11.35 C6.1
NetC13_1: C13.1 C14.1 J5.1 Q10.2 | length 37.7
  Top Layer w1.524: C14.1 8.3,44.9 9.7,46.3 ; C14.1@8.788,43.969 cw(c11.908,44.092) 9.7,46.3 ; Q10.2 14,35.2 17.4,38.6 ; Q10.2@14.316,36.938 ccw(c14.316,40.371) 16.744,37.944 ; Q10.2@16.054,35.24 cw(c20.653,35.347) 17.4,38.6 ; 16.14,44.96 ccw(c17.4,46.22) C13.1@17.4,44.438 ; 9.7,46.3 14.8,46.3 C13.1 17.4,38.6
  Bottom Layer w1.524: v3(16.2,33.8) 16.1,33.9 16.7,34.5 J5.1 ; v3@16.38,33.62 cw(c18.503,31.497) J5.1@18.503,34.5
NetD1_1: D1.1 R21.1 | length 10.4
  Bottom Layer w1.27: D1.1 9.4,25.8 10.8,27.2 ; D1.1@8.255,26.165 ccw(c8.301,29.699) 10.8,27.2 ; 10.5,26.9 ccw(c9.45,27.95) R21.1@10.935,27.95 ; R21.1@10.8,29.4 10.8,27.2 ; R21.1@10.919,28.014 cw(c10.313,27.687) 10.8,27.2
NetD1_2: D1.2 Q6.1 | length 5
  Top Layer w1.27: Q6.1@6.699,29.575 cw(c7.726,28.548) v5@7.726,30 ; v5@7.875,29.779 ccw(c7.18,28.554) Q6.1 6.634,30 v5(8,30)
NetD4_2: D4.2 R32.2 | length 4.6
  Bottom Layer w0.254: R32.2 8.3,47.1 ; R32.2@7.6,46.723 ccw(c7.6,47.503) 8.151,46.951 ; R32.2@7.823,46.5 cw(c8.12,46.5) R32.2@7.91,46.71 ; D4.2@7.975,47.857 cw(c7.258,47.1) 8.3,47.1 ; D4.2 8.3,47.1 ; D4.2@8.625,47.857 ccw(c9.342,47.1) 8.3,47.1
NetJ4_1: J4.1 Q6.2 | length 12
  Top Layer w1.27: Q6.2 17.116,30.6 ; Q6.2@14.316,29.165 ccw(c14.316,32.46) 16.646,30.13 ; Q6.2@16.156,27.606 cw(c19.546,28.17) 17.116,30.6 ; J4.1 17.116,30.6
NetJ4_2: J4.2 R21.2 | length 8.4
  Bottom Layer w1.27: R21.2@16.483,29.133 ccw(c17.4,29.656) 17.4,28.6 ; R21.2@16.505,29.105 ccw(c17.723,30.323) 17.723,28.6 ; R21.2@16.6,29.4 17.4,28.6 ; R21.2@16.611,29.389 ccw(c18.6,31.378) J4.2@18.6,28.565 ; J4.2 17.4,28.6 ; J4.2@18.624,28.574 cw(c18.025,29.225) 17.4,28.6
NetQ1_1: Q1.1 R4.2 R7.2 | length 8.2
  Bottom Layer w0.254: R4.2 Q1.1 13.5,9.3 R7.2 ; R4.2@12.358,7.642 cw(c12.738,7.262) 12.738,7.8 cw(c12.738,8.338) R4.2@12.358,7.958 ; Q1.1@13.236,7.536 ccw(c12.599,6.9) 12.599,7.8 ccw(c12.599,8.7) Q1.1@13.236,8.064 ; Q1.1@13.236,8.264 ccw(c12.599,8.9) 13.5,8.9 ccw(c14.4,8.9) Q1.1@13.764,8.264 ; Q1.1@13.5,8.379 cw(c14.721,8.379) R7.2@13.858,9.242 ; 13.5,8.992 cw(c14.108,8.992) R7.2@13.678,9.422
NetQ2_1: Q2.1 R12.2 R13.2 | length 16.4
  Bottom Layer w0.254: 11.678,8.678 ccw(c10.956,9.4) R12.2@11.977,9.4 ; R12.2 12.2,9.2 11.545,8.545 11.545,7.055 11.9,6.7 16.1,6.7 Q2.1 17.1,9.3 R13.2 ; 16.122,6.722 cw(c17.1,5.744) Q2.1@17.1,7.127 ; 16.555,7.155 cw(c17.1,6.611) Q2.1@17.1,7.381 ; Q2.1@16.605,7.205 ccw(c16.309,7.5) Q2.1@16.727,7.5 ; Q2.1@16.836,8.164 ccw(c16.2,8.8) 17.1,8.8 ccw(c18,8.8) Q2.1@17.364,8.164 ; Q2.1@17.1,8.379 cw(c18.321,8.379) R13.2@17.458,9.242 ; 17.1,8.992 cw(c17.708,8.992) R13.2@17.278,9.422
NetQ3_1: Q3.1 R15.2 R16.2 | length 9.8
  Bottom Layer w0.254: R15.2 2.9,32.4 4.2,33.7 R16.2 ; R15.2@3.123,32.2 cw(c4.144,32.2) 3.422,32.922 ; 3.436,32.936 cw(c4.5,31.873) R16.2@4.5,33.377 ; 3.87,33.37 cw(c4.5,32.74) R16.2@4.5,33.631 ; R16.2@4.342,33.958 ccw(c3.479,34.821) Q3.1@4.7,34.821 ; Q3.1@4.436,34.836 cw(c3.8,34.199) 4.7,34.199 cw(c5.6,34.199) Q3.1@4.964,34.836 ; R16.2@4.5,33.6 4.7,33.8 Q3.1 ; R16.2@4.522,33.778 ccw(c4.092,34.208) 4.7,34.208
NetQ4_1: Q4.1 R17.1 R18.1 | length 11.9
  Bottom Layer w0.254: R18.1@5.177,41.5 cw(c4.639,41.5) 5.019,41.119 cw(c5.4,40.739) R18.1@5.4,41.277 ; R18.1 5.4,41.5 4.5,40.6 4.5,39.4 R17.1 6.3,35.4 Q4.1 ; 5.749,38.151 ccw(c6.3,38.703) R17.1@6.3,37.923 ; Q4.1@5.936,35.764 ccw(c5.058,36.642) 6.3,36.642 ; R17.1@5.99,37.91 cw(c5.78,37.7) R17.1@6.077,37.7 ; Q4.1@6.116,35.584 ccw(c5.671,36.029) 6.3,36.029 ; R17.1@6.142,37.342 cw(c5.762,36.962) 6.3,36.962 cw(c6.838,36.962) R17.1@6.458,37.342 ; 6.3,36.159 ccw(c6.859,36.159) Q4.1@6.464,35.764
NetQ5_1: Q5.1 R19.1 R20.2 | length 9.5
  Bottom Layer w0.254: R19.1@11.242,32.358 ccw(c10.862,32.738) 11.4,32.738 ccw(c11.938,32.738) R19.1@11.558,32.358 ; R20.2@11.242,33.442 cw(c10.862,33.062) 11.4,33.062 cw(c11.938,33.062) R20.2@11.558,33.442 ; R20.2@11.242,33.958 ccw(c10.862,34.338) 11.4,34.338 ccw(c11.938,34.338) R20.2@11.558,33.958 ; R20.2@11.289,33.993 ccw(c10.918,34.635) 11.634,34.443 ; R19.1@11.4,32.4 11.4,33.6 11.4,35 Q5.1 ; R20.2@11.4,33.57 cw(c13.102,33.57) Q5.1@11.952,34.825 ; R20.2@11.4,34.148 cw(c12.573,34.148) Q5.1@11.78,35.012 ; 11.509,34.553 ccw(c12.325,34.334) 11.593,33.912 cw(c11.884,34.079) 11.56,34.166
NetQ6_3: Q6.3 Q9.3 Q10.1 R25.2 | length 25.4
  Top Layer w0.508: R25.2@5.5,26.233 ccw(c6.827,26.233) Q6.3@5.889,25.295 ; R25.2 5.5,25.734 ; Q6.3@5.755,25.378 cw(c5.876,25.734) 5.5,25.734 ; Q6.3 5.5,25.734
  Top Layer w1.27: Q9.3 5.4,24.266 ; Q6.3@5.679,25.054 cw(c4.714,24.952) 5.4,24.266 ; Q6.3 5.4,24.266
  Top Layer w1.524: 4.166,25.5 ccw(c5.644,26.979) Q6.3@5.644,24.888 ; 5.4,24.266 3.6,26.066 3.6,34.866 Q10.1 ; 5.539,36.805 ccw(c4.893,37.45) Q10.1@5.806,37.45
NetQ7_1: Q7.1 R22.1 R23.1 | length 13.9
  Top Layer w0.254: Q7.1 15.7,16.8 R22.1 ; Q7.1@15.689,16.421 cw(c16.534,15.669) 16.534,16.8 ; Q7.1@15.879,16.252 cw(c17.1,15.165) R22.1 ; R22.1@16.842,16.642 ccw(c16.462,16.262) 16.462,16.8 ccw(c16.462,17.338) R22.1@16.842,16.958 ; R22.1@17.2,16.577 cw(c17.2,16.28) R22.1@17.41,16.49 ; R22.1@17.423,16.8 ccw(c18.203,16.8) 17.651,16.249 ; v1@17.61,15.79 ccw(c17.393,16.007) 17.7,16.007 ccw(c18.007,16.007) v1@17.79,15.79 ; v1(17.7,15.7) 17.7,16.2 R22.1
  Bottom Layer w0.254: R23.1@15.9,12.169 ccw(c15.9,12.818) 16.359,12.359 ; R23.1@15.9,12.423 ccw(c15.9,13.686) 16.793,12.793 ; R23.1@16.1,12.1 16.9,12.9 16.9,13.3 17.7,14.1 v1(17.7,15.7) ; v1@17.61,15.61 cw(c17.393,15.393) 17.7,15.393 cw(c18.007,15.393) v1@17.79,15.61
NetQ7_3: Q7.3 Q8.2 R24.2 | length 16.2
  Top Layer w0.254: Q7.3 17.5,17.5 17.917,17.917 17.917,22 17.717,22.2 ; Q7.3@13.664,17.236 cw(c14.3,16.6) 14.3,17.5 cw(c14.3,18.4) Q7.3@13.664,17.764 ; R24.2 17.717,22.2 ; R24.2@17.362,22.047 cw(c17.717,21.712) 17.717,22.2 ; R24.2@17.362,22.353 ccw(c17.717,22.688) 17.717,22.2
  Top Layer w0.305: Q8.2 16.9,22.4 R24.2 ; Q8.2@15.746,22.154 cw(c16.339,21.561) 16.339,22.4 cw(c16.339,23.239) Q8.2@15.746,22.646 ; 16.04,22.4 cw(c16.04,21.24) R24.2@16.86,22.06
NetQ8_1: Q8.1 R24.1 R27.1 | length 14.6
  Top Layer w0.254: Q8.1@15.092,20.09 cw(c14.83,19.7) v1@15.3,19.7 ; v1@15.11,19.79 ccw(c14.652,20.248) Q8.1@15.3,20.248 ; Q8.1 v1@15.3,19.7 ; Q8.1@15.508,20.09 ccw(c15.77,19.7) v1@15.3,19.7
  Top Layer w0.305: Q8.1 16.9,20.4 R24.1 ; Q8.1@15.746,20.154 cw(c16.339,19.561) 16.339,20.4 cw(c16.339,21.239) Q8.1@15.746,20.646 ; 16.04,20.4 ccw(c16.04,21.56) R24.1@16.86,20.74
  Bottom Layer w0.254: v1@15.11,19.61 cw(c14.652,19.152) 15.3,19.152 ; v1@15.3,19.7 15.3,18.2 15.895,17.605 15.895,16.295 16.467,15.724 16.467,15.479 16.555,15.391 16.555,15.035 16.559,15.031 16.559,14.109 R27.1 ; R27.1@15.9,13.773 ccw(c15.9,14.553) 16.451,14.001 ; R27.1@16.123,13.55 cw(c16.42,13.55) R27.1@16.21,13.76
  other v1: 15.2,19.7
NetQ8_3: Q8.3 R28.2 | length 4.1
  Top Layer w0.305: R28.2 12.3,22.2 ; R28.2@11.44,22.06 cw(c11.777,21.723) 11.777,22.2 cw(c11.777,22.677) R28.2@11.44,22.34 ; Q8.3@12.555,21.446 ccw(c11.664,21.564) 12.3,22.2 ; Q8.3@12.648,21.852 ccw(c12.9,22.104) Q8.3@12.9,21.748 ; Q8.3 12.3,22.2
NetQ9_1: Q9.1 R28.1 R29.2 | length 7.7
  Top Layer w0.305: Q9.1 7.8,20.6 R29.2 R28.1 ; Q9.1@7.83,20.37 cw(c8.386,19.814) 8.386,20.6 ; Q9.1@8.046,20.154 cw(c9.122,19.078) 9.122,20.6 ; R29.2@9.36,20.46 ccw(c9.023,20.123) 9.023,20.6 ccw(c9.023,21.077) R29.2@9.36,20.74 ; R29.2@9.84,20.46 cw(c10.177,20.123) 10.177,20.6 cw(c10.177,21.077) R29.2@9.84,20.74 ; R28.1@10.96,20.46 ccw(c10.623,20.123) 10.623,20.6 ccw(c10.623,21.077) R28.1@10.96,20.74
NetR11_1: R11.1 R12.1 S1.1 | length 75.7
  Top Layer w0.254: v1(5.1,46.4) 8.291,46.4 10.091,48.2 S1.1 ; v1@5.19,46.31 cw(c5.407,46.093) 5.407,46.4 cw(c5.407,46.707) v1@5.19,46.49 ; S1.1@11.666,47.866 ccw(c10.858,47.058) 10.858,48.2 ccw(c10.858,49.342) S1.1@11.666,48.534
  Bottom Layer w0.254: 4.095,45.705 3.4,45.009 3.064,45.009 1.222,43.168 1.222,40.941 0.356,40.075 0.356,6.644 1.805,5.195 4.105,5.195 5.605,3.695 7.795,3.695 8.5,4.4 8.5,6 9.7,7.2 9.7,8.4 10.6,9.3 R12.1 ; 4.1,45.7 4.8,46.4 ; v1@5.009,46.312 ccw(c4.8,46.109) 4.8,46.4 ; v1@5.009,46.488 cw(c4.8,46.691) 4.8,46.4 ; v1(5.1,46.4) 4.8,46.4 ; R11.1@9.042,46.658 ccw(c8.662,47.038) 9.2,47.038 ccw(c9.738,47.038) R11.1@9.358,46.658 ; R11.1 9.2,47.3 10.1,48.2 S1.1 ; 10.149,8.849 ccw(c9.597,9.4) R12.1@10.377,9.4 ; R12.1@10.39,9.09 cw(c10.6,8.88) R12.1@10.6,9.177 ; S1.1@11.666,47.866 ccw(c10.858,47.058) 10.858,48.2 ccw(c10.858,49.342) S1.1@11.666,48.534
NRST: C15.1 U2.7 | length 4.8
  Top Layer w0.254: C15.1 11.75,17.15 v4(12.8,16.1) ; C15.1@11.75,16.977 cw(c11.75,16.559) 12.045,16.855 cw(c12.341,17.15) C15.1@11.923,17.15 ; v4@12.698,16.1 ccw(c12.453,16.1) 12.627,16.273 ccw(c12.8,16.447) v4@12.8,16.202
  Bottom Layer w0.254: U2.7@11.25,15.75 U2.7 12.45,15.75 v4(12.8,16.1) ; v4@12.698,16.1 cw(c12.453,16.1) 12.627,15.927 cw(c12.8,15.753) v4@12.8,15.998
SPARE1: R30.2 U2.18 | length 5.1
  Bottom Layer w0.254: R30.2@6.825,9.424 cw(c7.23,9.536) R30.2@6.933,9.833 ; R30.2@6.883,9.69 ccw(c6.753,9.9) 7,9.9 ; R30.2 7,9.9 ; R30.2@7.07,9.492 cw(c7.714,9.669) 7.242,10.142 ; R30.2@7.117,9.69 cw(c7.247,9.9) 7,9.9 ; R30.2@7.315,9.559 cw(c8.197,9.803) 7.55,10.45 ; U2.18 7.55,10.45 ; 7,9.9 7.55,10.45
SPARE2: R31.2 U2.19 | length 3.7
  Bottom Layer w0.254: R31.2 7.05,10.95 U2.19 ; R31.2@5.7,9.723 ccw(c5.7,10.02) R31.2@5.91,9.81 ; R31.2@5.923,9.5 cw(c6.703,9.5) 6.151,10.051
SWCLK: J6.2 U2.37 | length 11.2
  Top Layer w0.254: J6.2@1.8,26.127 cw(c1.8,25.571) 2.193,25.964 ; J6.2 1.8,26.357 4.1,24.057 v1(4.1,20.4) ; J6.2@2.019,26.6 ccw(c3.134,26.6) 2.345,25.812 ; J6.2@2.273,26.6 ccw(c4.001,26.6) 2.779,25.378 ; v1@4.01,20.49 ccw(c3.793,20.707) 4.1,20.707 ccw(c4.407,20.707) v1@4.19,20.49
  Bottom Layer w0.254: v1(4.1,20.4) 4.25,20.25 U2.37 cw(c4.55,20.627) v1@4.213,20.457
SWDIO: J6.4 U2.34 | length 14.2
  Top Layer w0.254: J6.4@1.466,22.266 cw(c-0.549,20.251) v1@2.3,20.251 ; J6.4@1.645,22.445 cw(c0.064,20.864) 2.3,20.864 ; J6.4 2.3,22.1 ; J6.4@1.825,22.625 cw(c0.677,21.477) 2.3,21.477 ; J6.4@1.981,22.163 cw(c2.094,21.894) 2.3,22.1 ; J6.4@2.004,22.804 cw(c1.291,22.091) 2.3,22.091 ; v1@2.198,20.175 ccw(c1.887,20.403) 2.268,20.461 ; v1@2.21,20.19 ccw(c1.993,20.407) 2.3,20.407 ccw(c2.607,20.407) v1@2.39,20.19 ; J6.4@2.237,22.419 ccw(c2.506,22.306) 2.3,22.1 ; v1(2.3,20.1) 2.3,22.1
  Bottom Layer w0.254: v1@2.173,20.1 cw(c1.866,20.1) 2.083,19.883 cw(c2.3,19.666) v1@2.3,19.973 ; v1(2.3,20.1) 1.981,19.781 1.981,17.9 2.131,17.75 U2.34
TTL1_RX: R9.2 U2.31 | length 37.4
  Bottom Layer w0.254: U2.31 4.26,16.25 4.669,15.841 5.131,15.841 5.459,16.169 5.459,18.131 5.131,18.459 4.48,18.459 3,19.939 3,21 4.232,22.232 4.232,29.979 3.7,30.511 3.7,32.531 4.024,32.855 5.055,32.855 6.4,34.2 6.9,34.2 7.2,34.5 7.2,38.3 8.5,39.6 8.5,42.6 ; R9.2 8,43.1 ; R9.2@7.595,43.131 cw(c7.697,42.5) 8.148,42.952 ; R9.2@7.635,42.88 cw(c7.794,41.894) 8.5,42.6 ; R9.2@7.79,42.983 cw(c8,42.853) 8,43.1 ; R9.2@7.79,43.217 ccw(c8,43.347) 8,43.1 ; 8,43.1 8.5,42.6
TTL1_TX: R8.2 U2.30 | length 39.8
  Bottom Layer w0.254: U2.30@2.75,15.75 2.026,15.75 1.575,16.202 1.575,20.185 3.8,22.411 3.8,29.8 1.676,31.924 1.676,39.563 2.518,40.405 2.518,42.018 2.945,42.445 4.076,42.445 4.255,42.624 4.255,43.412 5.388,44.546 9,44.546 9.5,44.046 R8.2 ; R8.2@9.342,43.258 ccw(c8.962,43.638) 9.5,43.638 ccw(c10.038,43.638) R8.2@9.658,43.258
WAKEUP: D2.2 D3.2 R26.1 U2.10 | length 20.8
  Bottom Layer w0.254: U2.10@11.25,14.25 13.85,14.25 14.4,14.8 13.5,15.7 13.5,17.2 D3.2@13.5,20 ; D2.2@13.095,16.895 cw(c12.117,15.917) 13.5,15.917 cw(c14.883,15.917) D2.2@13.905,16.895 ; D2.2@13.095,18.105 ccw(c12.117,19.083) 13.5,19.083 ccw(c14.883,19.083) D2.2@13.905,18.105 ; D3.2@13.095,19.795 cw(c12.117,18.817) 13.5,18.817 cw(c14.883,18.817) D3.2@13.905,19.795 ; D2.2@13.274,17.074 cw(c12.73,16.53) 13.5,16.53 cw(c14.27,16.53) D2.2@13.726,17.074 ; D2.2@13.274,17.926 ccw(c12.73,18.47) 13.5,18.47 ccw(c14.27,18.47) D2.2@13.726,17.926 ; D3.2@13.274,19.974 cw(c12.73,19.43) 13.5,19.43 cw(c14.27,19.43) D3.2@13.726,19.974 ; R26.1@14.077,14.7 cw(c13.539,14.7) 13.919,14.319 cw(c14.3,13.939) R26.1@14.3,14.477 ; R26.1@14.077,14.9 ccw(c13.539,14.9) 13.919,15.281 ccw(c14.3,15.661) R26.1@14.3,15.123
XTAL: U2.5
YL_AUOUT: D2.1 Q4.3 | length 36
  Bottom Layer w0.254: Q4.3 7.355,32.945 10.186,32.945 10.6,32.531 10.6,31.669 10.276,31.345 6.5,31.345 6,30.845 6,23.4 7.321,22.079 15.321,22.079 15.8,21.6 15.8,18.6 ; Q4.3@7.464,32.636 cw(c8.21,31.89) 8.21,32.945 ; Q4.3@7.464,33.164 ccw(c7.991,33.691) 7.991,32.945 ; 16.063,18.337 cw(c15.426,17.7) D2.1@16.327,17.7 ; 16.156,18.244 ccw(c16.731,18.819) D2.1@16.852,18.015 ; D2.1@16.814,18.267 cw(c16.637,19.437) 15.8,18.6 ; D2.1 15.8,18.6
YL_AUX: J2.6 R18.2 | length 6.4
  Bottom Layer w0.254: J2.6 6.3,40.8 ; R18.2 6.3,42.3 6.3,40.8 ; J2.6@5.503,40.473 ccw(c5.511,41.589) 6.3,40.8 ; R18.2@5.6,42.877 cw(c5.6,42.58) R18.2@5.81,42.79 ; R18.2@5.823,43.1 ccw(c6.603,43.1) 6.051,42.549 ; J2.6@5.973,40.003 cw(c7.089,40.011) 6.3,40.8
YL_EN: R19.2 U2.17 | length 43.4
  Bottom Layer w0.254: U2.17 8.05,13 8.45,13.4 9.9,13.4 12.6,10.7 14.6,10.7 15.1,11.2 15.1,16.041 14.641,16.5 14.641,19.931 14.7,19.99 14.7,21.5 14.553,21.647 7.142,21.647 5.568,23.221 5.568,31.024 6.544,32 R19.2@9.8,32 ; R19.2@9.642,31.842 ccw(c9.262,31.462) 9.262,32 ccw(c9.262,32.538) R19.2@9.642,32.158
YL_ENOUT: J2.3 Q5.3 R3.1 | length 10.4
  Bottom Layer w0.254: Q5.3 11.5,38.3 ; Q5.3@10.72,37.817 ccw(c10.805,38.303) Q5.3@11.154,37.954 ; Q5.3@10.764,38.067 ccw(c10.908,38.892) 11.5,38.3 ; Q5.3@11.073,37.7 cw(c11.491,37.7) Q5.3@11.195,37.995 ; J2.3@11.166,39.666 cw(c10.358,38.858) 11.5,38.858 cw(c12.642,38.858) J2.3@11.834,39.666 ; J2.3@11.166,40.334 ccw(c10.358,41.142) 11.5,41.142 ccw(c12.642,41.142) J2.3@11.834,40.334 ; R3.1@11.342,41.342 cw(c10.962,40.962) 11.5,40.962 cw(c12.038,40.962) R3.1@11.658,41.342 ; R3.1 J2.3 11.5,38.3
YL_RX: J2.4 R8.1 | length 4.1
  Bottom Layer w0.254: J2.4@9.166,40.334 ccw(c8.358,41.142) 9.5,41.142 ccw(c10.642,41.142) J2.4@9.834,40.334 ; R8.1@9.342,41.342 cw(c8.962,40.962) 9.5,40.962 cw(c10.038,40.962) R8.1@9.658,41.342 ; J2.4 R8.1
YL_SET: R15.1 U2.29 | length 22.4
  Bottom Layer w0.254: U2.29 5.151,15.25 5.891,15.99 5.891,18.31 5.31,18.891 4.659,18.891 3.5,20.05 3.5,20.889 4.664,22.053 4.664,31.936 R15.1 ; R15.1@4.342,31.842 cw(c3.567,31.067) 4.664,31.067 ; R15.1@4.522,32.022 cw(c4.18,31.68) R15.1@4.664,31.68
YL_SETOUT: J2.7 Q3.3 R10.1 | length 10.5
  Bottom Layer w0.254: J2.7@3.166,39.666 cw(c2.358,38.858) 3.5,38.858 cw(c4.642,38.858) J2.7@3.834,39.666 ; J2.7@3.166,40.334 ccw(c2.358,41.142) 3.5,41.142 ccw(c4.642,41.142) J2.7@3.834,40.334 ; R10.1@3.342,41.342 cw(c2.962,40.962) 3.5,40.962 cw(c4.038,40.962) R10.1@3.658,41.342 ; 3.5,38.47 ccw(c4.47,38.47) Q3.3@3.784,37.784 ; 3.5,39.083 ccw(c5.083,39.083) Q3.3@3.964,37.964 ; R10.1 J2.7 3.5,37.7 Q3.3
YL_TX: J2.5 R9.1 | length 4.1
  Bottom Layer w0.254: J2.5@7.166,40.334 ccw(c6.358,41.142) 7.5,41.142 ccw(c8.642,41.142) J2.5@7.834,40.334 ; R9.1@7.342,41.342 cw(c6.962,40.962) 7.5,40.962 cw(c8.038,40.962) R9.1@7.658,41.342 ; J2.5 R9.1
pads on no net: J3.2 R30.1 R31.1 U2.2 U2.3 U2.4 U2.6 U2.20 U2.21 U2.22 U2.25 U2.26 U2.27 U2.28 U2.33 U2.38 U2.39 U2.40 U2.41 U2.42 U2.43 U2.45 U2.46

## Keep-outs
Keep-Out Layer:
  the board outline again, w0.152

## Silkscreen, mask and mechanical layers (free items; w line width, h text height)
Top Overlay:
  text "- +" at 13.9,3.6 h0.64 r180
  text "- +" at 6.4,2.9 h0.64